# Altium PCB MotorBoardPannel.PcbDoc
Units mm, origin at the board's own origin, x right, y up, seen from the top; angles counter-clockwise.
Board outline 100 x 100 mm, 2 copper layers (Top, Bottom), stack 1.67 mm thick; 42 components, 22 nets, 151 pads, 44 vias.
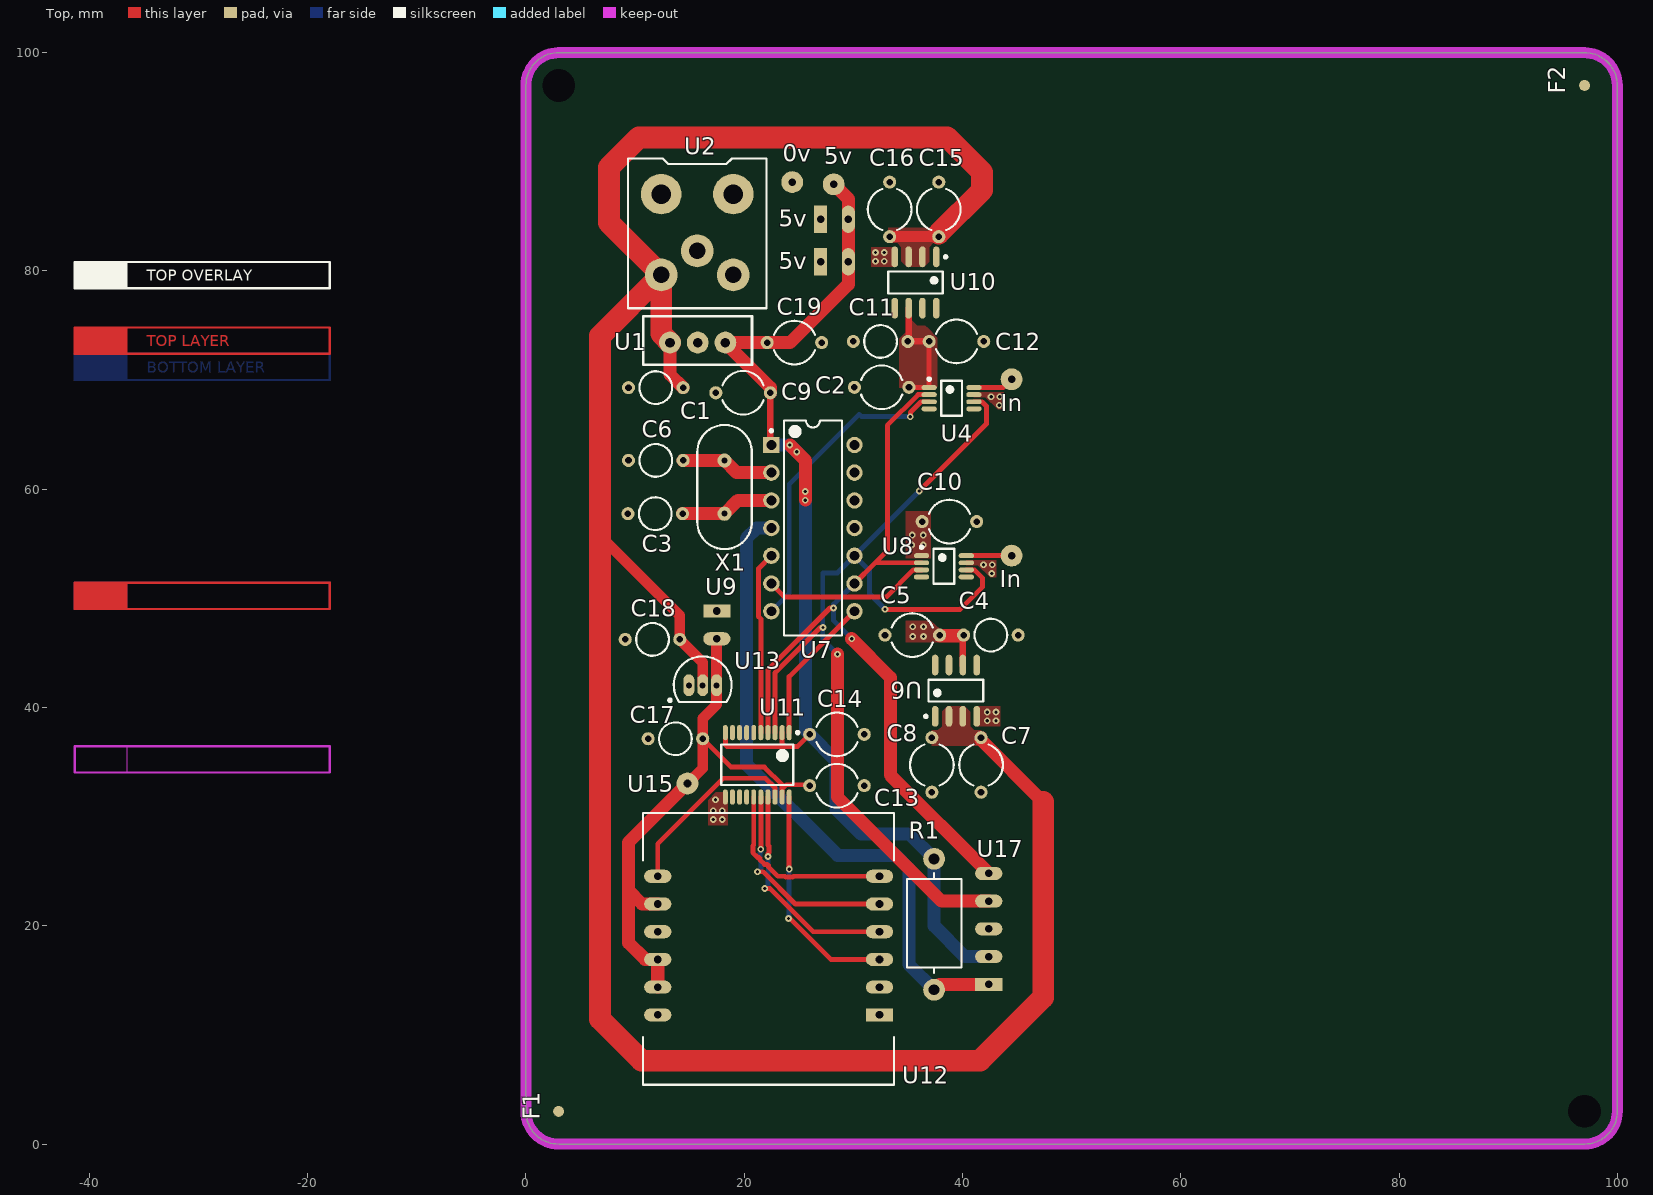
[diagram p0: Top view]
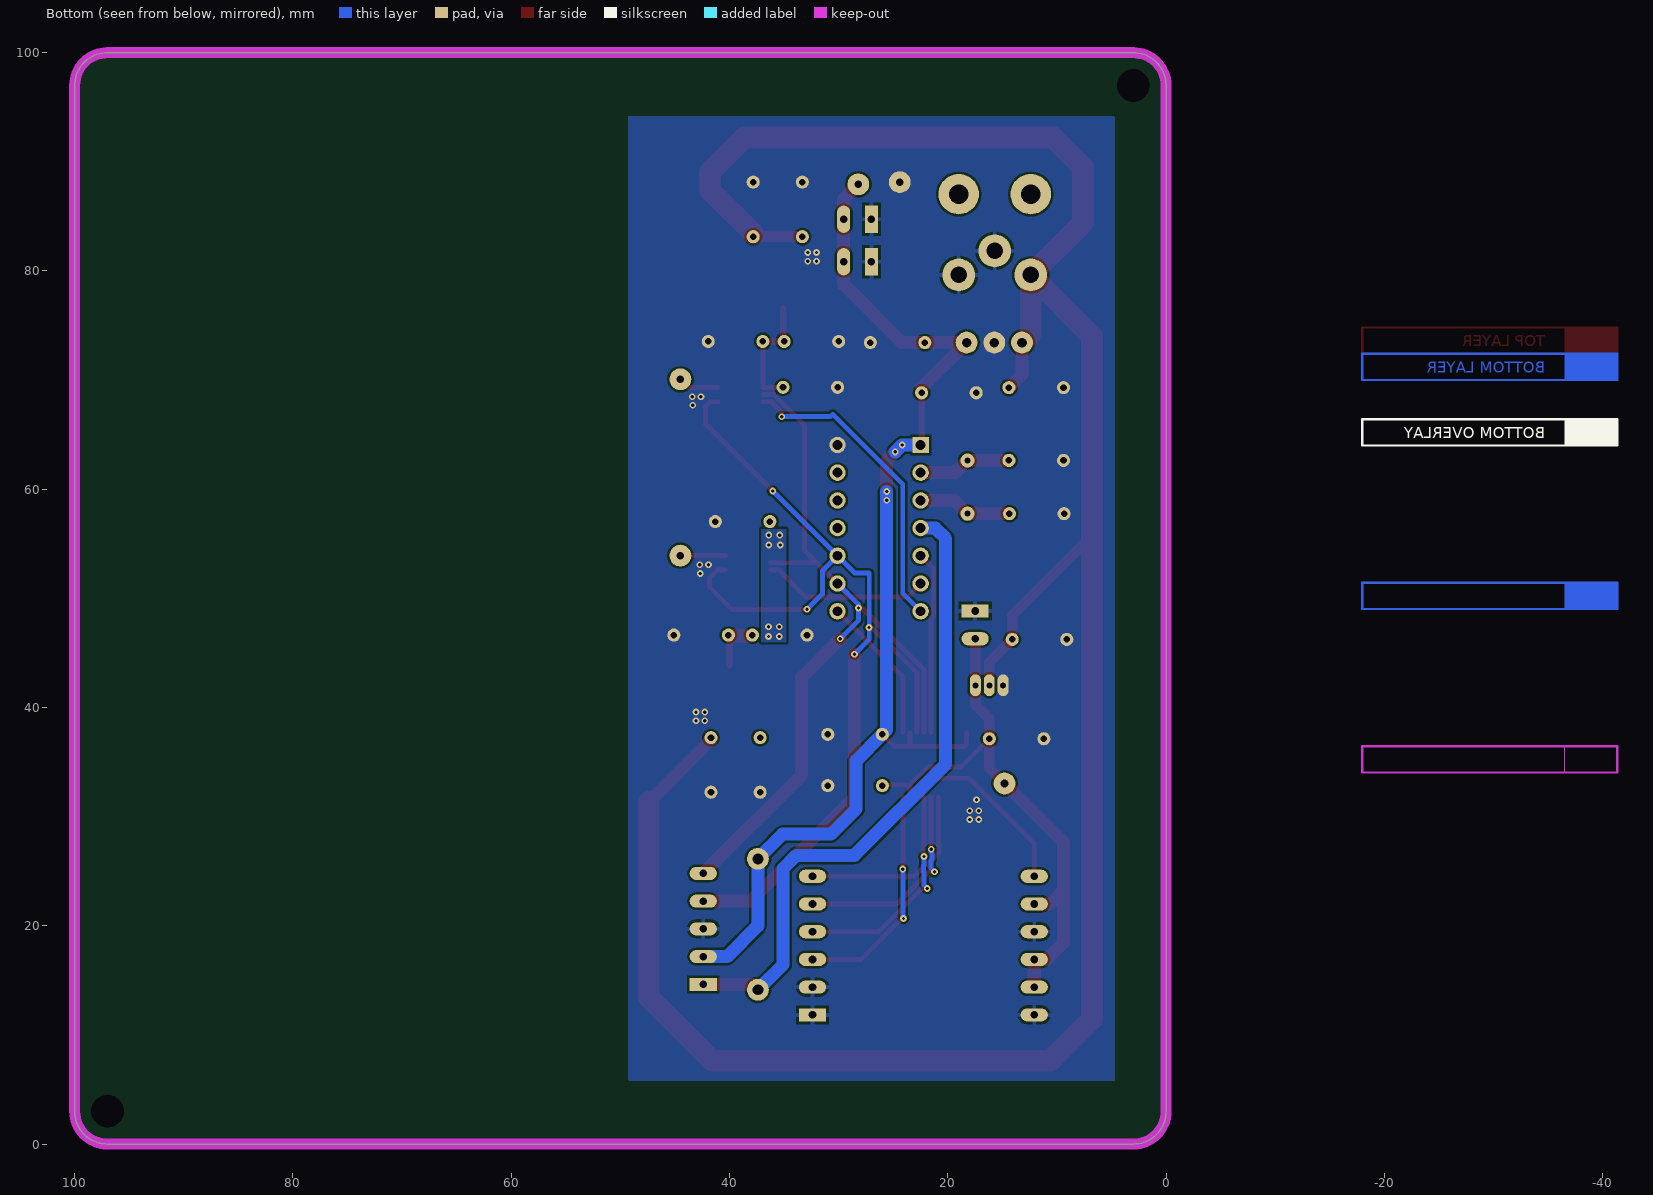
[diagram p1: Bottom view, seen from below]

## Layer stack, top to bottom
Top Solder: solder mask 0.0102, Solder Resist, Dk 3.5
Top: signal copper 0.035
Dielectric1: core 1.6, FR-4, Dk 4.58
Bottom: signal copper 0.035
Bottom Solder: solder mask 0.0102, Solder Resist, Dk 3.5

## Board outline
0,3 0,97 cw(c3,97) 3,100 97,100 cw(c97,97) 100,97 100,3 cw(c97,3) 97,0 3,0 cw(c3,3)

## Design rules (kind name [scope] priority, off if disabled: settings)
AssemblyTestPointUsage [All] p1 off:
AssemblyTestpoint [All] p1 off: testpointundercomponent=TRUE minsize=1.016 maxsize=2.54 preferedsize=1.524 minholesize=0 maxholesize=1.016 preferedholesize=0.813 testpointgrid=0.025 usegrid=TRUE gridtolerance=0 allowsidetop=TRUE allowsidebottom=TRUE
Clearance ClearanceViaPad [IsVia vs IsPad] p1: gap=0.1
Clearance ClearanceGNDpolygons [InPolygonClass('GNDpolygons')] p2: gap=0.3
Clearance ClearanceTechnology [All] p3: gap=0.2
FabricationTestPointUsage [All] p1 off: valid=0 allowmultiple=FALSE
FabricationTestpoint [All] p1 off: side=3 testpointundercomponent=TRUE minsize=1.016 maxsize=2.54 preferedsize=1.524 minholesize=0 maxholesize=1.016 preferedholesize=0.813 testpointgrid=0.025 allowsidetop=TRUE allowsidebottom=TRUE usegrid=TRUE gridtolerance=0
HoleSize [All] p1: absolutevalues=TRUE maxlimit=6.3 minlimit=0.3 maxpercent=80.000 minpercent=20.000
HoleToHoleClearance [All] p1: gap=0.3 allowstackedmicrovias=TRUE
MinimumAnnularRing [All] p1: minimumring=0.152
MinimumSolderMaskSliver [All] p1: minsoldermaskwidth=0.1
PlaneClearance [All] p1: clearance=0.25
PolygonConnect PolygonConnectVia [IsVia] p1: connectstyle=Direct reliefconductorwidth=0.4 reliefentries=4 polygonreliefangle="90 Angle" airgapwidth=0.254
PolygonConnect PolygonConnectBigPads [(ObjectKind = 'Pad') And ((AsMM(PadXSize_AllLayers) > 2) Or (AsMM(PadYSize_AllLayers) > 2))] p2: connectstyle=Relief reliefconductorwidth=0.4 reliefentries=4 polygonreliefangle="90 Angle" airgapwidth=0.254
PolygonConnect PolygonConnectGeneral [All] p3: connectstyle=Direct reliefconductorwidth=0.3 reliefentries=4 polygonreliefangle="90 Angle" airgapwidth=0.2
RoutingVias [All] p1: holewidth=0.6 width=1.2 viastyle="Through Hole" minholewidth=0.3 minwidth=0.62 maxholewidth=0.9 maxwidth=1.4
SilkToSilkClearance [All] p1: silktosilkclearance=0.15
SilkToSolderMaskClearance SilkscreenOverComponentPads [IsPad] p1: minsilkscreentomaskgap=0.1 clearancetoexposedcopper=FALSE
SolderMaskExpansion [All] p1: expansion=0.1
UnpouredPolygon [All] p1: allowunpoured=FALSE
Width WidthTechnology [All] p1: maxlimit=3 minlimit=0.16 preferedwidth=0.6
19 further rules are at their usual default settings.

## Components (designator, comment, footprint, x,y, rotation, side; value= is the part's Value field where it differs from the comment)
0v "Ground" Ground 24.4,88.14 r0 top (schematic designator U16)
5v "SignalOut" SignalOut 27,80.84 r90 top (schematic designator U3)
5v "SignalOut" SignalOut 27,84.74 r90 top (schematic designator U5)
5v "Ref" Ground 28.2,87.94 r0 top (schematic designator U14)
C1 "330nF" "FK18/24 Capacitor" 9.4,69.315 r0 top
C2 "680nF" "FK26/16 Capacitor" 30.1,69.34 r0 top
C3 "27pF" "FK18/24 Capacitor" 9.352,57.76 r0 top
C4 "1uF" "FK18/24 Capacitor" 45.1,46.64 r180 top
C5 "0.1uF" "FK26/16 Capacitor" 32.9,46.64 r0 top
C6 "27pF" "FK18/24 Capacitor" 9.4,62.64 r0 top
C7 "0.1uF" "FK26/16 Capacitor" 41.7,32.24 r90 top
C8 "10uF" "FK26/16 Capacitor" 37.2,32.24 r90 top
C9 "0.1uF" "FK26/16 Capacitor" 17.4,68.84 r0 top
C10 "680nF" "FK26/16 Capacitor" 41.3,57.04 r180 top
C11 "1uF" "FK18/24 Capacitor" 30,73.54 r0 top
C12 "0.1uF" "FK26/16 Capacitor" 41.95,73.54 r180 top
C13 "0.1uF" "FK26/16 Capacitor" 31,32.84 r180 top
C14 "0.1uF" "FK26/16 Capacitor" 26,37.54 r0 top
C15 "0.1uF" "FK26/16 Capacitor" 37.829,88.14 r270 top
C16 "10uF" "FK26/16 Capacitor" 33.329,88.14 r270 top
C17 "1uF" "FK18/24 Capacitor" 11.2,37.14 r0 top
C18 "1uF" "FK18/24 Capacitor" 9.1,46.24 r0 top
C19 "DNP" "FK26/16 Capacitor" 27.1,73.44 r180 top
F1 "Fiducial" FIDUCIAL 3,3 r90 top locked
F2 "Fiducial" FIDUCIAL 97,97 r90 top locked
In "Ref" Ground 44.5,70.075 r0 top (schematic designator U18)
In "Ref" Ground 44.5,53.915 r0 top (schematic designator U19)
R1 "DNP" "Axial 0.5" 37.405,14.14 r90 top
U1 "+5V LDO" MC7805CTG 13.2,73.44 r90 top
U2 "PJ-047A" PJ-047A 12.4,79.64 r90 top
U4 "AD7476ABRMZ" RM-8_L 39,68.34 r0 top
U6 "REF195GSZ" ADI-R-8_L 39.4,41.54 r90 top
U7 "PIC16F1455-I/P" MCHP-PDIP-P14 26.3,56.44 r0 top
U8 "AD7478AARMZ" RM-8_L 38.3,52.94 r0 top
U9 "SignalOut" SignalOut 17.5,48.84 r0 top
U10 "REF195GSZ" ADI-R-8_L 35.7,78.94 r270 top
U11 "TXB0108PWR" TSOP65P640X120-20N 21.2,34.751 r270 top
U12 "WIZ820io" WIZ5200 32.4,11.84 r180 top
U13 "MCP1700-3302E/TO" TO-92-TO3 16.2,42.04 r270 top
U15 "Ref" Ground 14.8,33.04 r0 top
U17 "ProgrammingHeader" ProgrammingHeader 42.405,14.64 r180 top
X1 "16MHz" 9B-16.000MEEJ-B 18.2,62.64 r270 top

## Footprints (in the part's own frame and the unit in brackets; to place one, negate y for a bottom-side part, rotate by r counter-clockwise, add the part's x,y. Pads: shape width x height; smd on the part's side, far side on the other; paste and mask are expansions set on the pad)
9B-16.000MEEJ-B [mm]
  round 1.3 hole 0.55: 1(0,0) 2(4.88,0)
  silkscreen extent -3.25,-2.5 8.13,2.5
ADI-R-8_L [mm] "SOIC, 8-Leads, Body 4.9x3.9mm, Pitch 1.27mm, IPC High Density"
  oval 1.9x0.6 smd: 1(-2.35,1.905) 2(-2.35,0.635) 3(-2.35,-0.635) 4(-2.35,-1.905) 5(2.35,-1.905) 6(2.35,-0.635) 7(2.35,0.635) 8(2.35,1.905)
  silkscreen extent -2.47,-2.5 1,2.88, body extent -2,-2.5 2,2.5, height 1.75
"Axial 0.5" [mm]
  round 2 hole 1: 1(0,0) 2(12,0)
  silkscreen extent 1.52,-2.5 10.67,2.5
FIDUCIAL [mm] "Fiducial"
  round 1 smd paste-1 mask+0.5: ""(0,0)
  body extent -0.49,-0.5 0.5,0.5, height 0.5
"FK18/24 Capacitor" [mm]
  round 1.2 hole 0.6: 1(0,0) 2(5,0)
  silkscreen extent 1,-1.5 4,1.5
"FK26/16 Capacitor" [mm]
  round 1.2 hole 0.6: 1(0,0) 2(5,0)
  silkscreen extent 0.62,-2 4.38,2
Ground [mm]
  round 2 hole 0.7: 1(0,0)
MC7805CTG [mm]
  round 2 hole 0.88: 1(0,0) 2(0,-2.54) 3(0,-5.08)
  silkscreen extent -2.03,-7.52 2.41,2.44
MCHP-PDIP-P14 [mm] "DIP, 14-Leads, Body 19.177x6.604mm, Pitch 2.54mm"
  rect 1.5x1.5 hole 0.9: 1(-3.81,7.62)
  round 1.5 hole 0.9: 2(-3.81,5.08) 3(-3.81,2.54) 4(-3.81,0) 5(-3.81,-2.54) 6(-3.81,-5.08) 7(-3.81,-7.62) 8(3.81,-7.62) 9(3.81,-5.08) 10(3.81,-2.54) 11(3.81,0) 12(3.81,2.54) 13(3.81,5.08) 14(3.81,7.62)
  silkscreen extent -3.93,-9.85 2.65,9.85, body extent -3.95,-9.85 3.95,9.85, height 5.34
PJ-047A [mm]
  round 3 hole 1.5: 1(0,0) 2(0,-6.6) 2(2.2,-3.3)
  round 3.7 hole 1.8: ""(7.4,-6.6) ""(7.4,0)
  silkscreen extent -3.05,-9.65 10.67,3.05
ProgrammingHeader [mm]
  rect 2.5x1.2 hole 0.7: 1(0,0)
  oval 2.5x1.2 hole 0.7: 2(0,-2.54) 3(0,-5.08) 4(0,-7.62) 5(0,-10.16)
RM-8_L [mm] "TSOP, 8-Leads, Body 3x3mm, Pitch 0.65mm, IPC High Density"
  oval 1.4x0.45 smd mask+0: 1(-2.05,0.975) 2(-2.05,0.325) 3(-2.05,-0.325) 4(-2.05,-0.975) 5(2.05,-0.975) 6(2.05,-0.325) 7(2.05,0.325) 8(2.05,0.975)
  silkscreen extent -2.17,-1.6 0.95,1.87, body extent -1.6,-1.6 1.6,1.6, height 1.1
SignalOut [mm]
  rect 2.5x1.2 hole 0.7: 1(0,0)
  oval 2.5x1.2 hole 0.7: 2(0,-2.54)
TO-92-TO3 [mm] "TO, Flat Index; 3 In-Line, Axial Leads; Body Dia. 4.8mm; Leads 0.56 x 0.53 mm (max)"
  oval 2x1 hole 0.55 mask+0.05: 1(0,-1.27) 2(0,0) 3(0,1.27)
  silkscreen extent -2.65,-3.13 1.52,2.65, body extent -2.66,-2.66 1.52,2.66, height 5.33
TSOP65P640X120-20N [mm] "TSOP, 20-Leads, Body 6.50x4.40mm, Pitch 0.65mm, IPC Medium Density"
  oval 1.4x0.45 smd mask+0.02: 1(-2.95,2.925) 2(-2.95,2.275) 3(-2.95,1.625) 4(-2.95,0.975) 5(-2.95,0.325) 6(-2.95,-0.325) 7(-2.95,-0.975) 8(-2.95,-1.625) 9(-2.95,-2.275) 10(-2.95,-2.925) 11(2.95,-2.925) 12(2.95,-2.275) 13(2.95,-1.625) 14(2.95,-0.975) 15(2.95,-0.325) 16(2.95,0.325) 17(2.95,0.975) 18(2.95,1.625) 19(2.95,2.275) 20(2.95,2.925)
  silkscreen extent -3.07,-3.3 1.85,3.83, body extent -2.25,-3.3 2.25,3.3, height 1.2
WIZ5200 [mm]
  rect 2.5x1.2 hole 0.7: 1(0,0)
  oval 2.5x1.2 hole 0.7: 2(0,-2.54) 3(0,-5.08) 4(0,-7.62) 5(0,-10.16) 6(0,-12.7) 7(20.32,-12.7) 8(20.32,-10.16) 9(20.32,-7.62) 10(20.32,-5.08) 11(20.32,-2.54) 12(20.32,0)
  silkscreen extent -1.34,-18.5 21.66,6.4

## Part data
C1: library part FK24X7R1H334K, "CAP CER 0.33UF 50V 10% RADIAL"
C2 C10: library part FK26X7R1H684K, "CAP CER 0.68UF 50V 10% RADIAL"
C3 C6: library part FK18C0G1H270J, "CAP CER 27PF 50V 5% RADIAL"
C4 C11 C17 C18: library part FK24X7R1H105K, "CAP CER 1UF 50V 10% RADIAL"
C5 C7 C9 C12 C13 C14 C15: library part FK26X7R2A104K, "CAP CER 0.1UF 100V 10% RADIAL"
C8 C16: library part FK16X7R1C106K, "CAP CER 10UF 16V 10% RADIAL"
C19: library part "DNP Cap"
R1: library part "DNP Res"
U1: library part MC7805CTG, "IC REG LDO 5V 1A TO220AB"
U2: "CON PWR JCK 2.0 X 6.0MM W/SHLD"
U4: "Single 12-Bit Analog-to-Digital Converter with Serial, SPI Interface, 2.35 to 5.25 V, 1MSPS, -40 to +85 degC, RM-8, Pb-Free, Tube"
U6 U10: "Precision Micropower, Low Dropout Voltage Reference, 5 V Output, 5.1 to 15 V Supply, Industrial, 8-pin SOIC (R-8), Tube"
U7: "8-Bit Flash USB Microcontroller with XLP Technology, 48 MHz, 11 I/O, -40 to 85 degC, 14-pin PDIP (P14), Tube"
U8: "Single 8-Bit Analog-to-Digital Converter with Serial, SPI Interface,2.35 V, 1.2MSPS, -40 to +85 degC, RM-8, Pb-Free, Tube"
U11: "IC 8-BIT TRNSTR 15KV ESD 20TSSOP"
U12: "Ethernet Modules W5200 & MAG JACK ioPLATFORM MODULE"
U13: "Low Quiescent Current LDO, 3-Pin TO-92, Extended TemperatureBAG"
X1: library part 9B-16.000MEEJ-B, "CRYSTAL 16MHZ 18PF THRU"

## Free pads (board coordinates)
  round 1 hole 3: 0(3,97) 0(97,3)

## Via types
v1: diameter 0.62, hole 0.3, Top to Bottom, 40 vias
v2: diameter 0.62, hole 0.3, Top to Bottom, tented bottom, 4 vias

## Nets (pads, with @x,y where several pads share a name; then routed paths per layer and width w, separated by ;. In a path a pad name is that pad's centre, name@x,y a point inside that pad or via, vN(x,y) a via of type N, cw(c..) or ccw(c..) an arc to the next point about the centre after c; other vN are vias at no path point)
GND: 0v.1 5v.1@27,80.84 5v.1@27,84.74 C1.1 C2.1 C3.1 C4.1 C5.1 C6.1 C7.1 C8.1 C9.1 C10.1 C11.1 C12.1 C13.1 C14.2 C15.1 C16.1 C17.1 C18.1 C19.1 U1.2 U2.2 U4.7 U6.4 U7.14 U8.7 U9.1 U10.4 U11.11 U12.1 U12.2 U12.9 U12.12 U13.1 U17.3 | length 0.1
  Top w0.6: U1.2@15.7,73.48 U1.2
  other v1: 17.175,29.75 18,29.75 17.175,30.55 18,30.55 17.375,31.55 42.275,38.78 43.075,38.78 42.275,39.58 43.075,39.58 41.925,53.075 42.625,68.475 32.025,80.9 32.825,80.9 32.025,81.7 32.825,81.7
  other v2: 42.675,52.286 42.725,53.075 43.375,67.686 43.425,68.475
MCLR: R1.1 U7.4 U17.1 | length 59.5
  Top w1.2: R1.1 37.905,14.64 U17.1
  Bottom w1.2: U7.4 21.14,56.44 20.2,55.5 20.2,34.809 28.555,26.453 33.877,26.453 35.1,25.23 35.1,16.445 R1.1
NetC3_2: C3.2 U7.3 X1.2 | length 8.6
  Top w1.2: C3.2 X1.2 19.42,58.98 U7.3
NetC6_2: C6.2 U7.2 X1.1 | length 8.6
  Top w1.2: C6.2 X1.1 19.32,61.52 U7.2
NetU4_3: U4.3 U7.7 | length 28.7
  Top w0.45: v1(35.225,66.65) 35.225,67.034 36.206,68.015 U4.3
  Bottom w0.45: U7.7 24.13,50.46 24.13,60.47 30.534,66.874 30.758,66.65 v1(35.225,66.65)
NetU4_8: In.1@44.5,70.075 U4.8 | length 3.8
  Top w0.45: U4.8 43.74,69.315 In.1@44.5,70.075
NetU7_5: U7.5 U11.5 | length 16.8
  Top w0.45: U11.5 21.525,48.123 21.315,48.333 21.315,52.725 U7.5
NetU7_6: U7.6 U8.3 | length 15.3
  Top w0.45: U7.6 23.732,50.118 33.008,50.118 35.506,52.615 U8.3
NetU7_8: U7.8 U11.1 | length 13.6
  Top w0.45: U11.1 24.125,42.835 U7.8
NetU8_8: In.1@44.5,53.915 U8.8 | length 4.1
  Top w0.45: U8.8 In.1@44.5,53.915
NetU11_15: U11.15 U12.6 | length 17.8
  Top w0.45: U11.15 20.875,27.399 20.79,27.314 20.79,26.705 21.221,26.274 21.341,26.274 21.44,26.175 21.44,26.055 21.871,25.624 22.111,25.624 22.213,25.522 22.213,25.402 23.075,24.54 23.739,24.54 23.821,24.459 24.429,24.459 24.511,24.54 U12.6
NetU11_16: U11.16 U12.5 | length 19
  Top w0.45: v1(21.226,24.951) 21.745,24.951 24.696,22 U12.5 ; v1(21.525,27.009) U11.16
  Bottom w0.45: 21.525,25.265 21.525,25.97 21.44,26.055 21.44,26.664 21.525,26.749 v1(21.525,27.009)
NetU11_17: U11.17 U12.4 | length 20.3
  Top w0.45: v1(21.876,23.426) 22.35,23.426 26.317,19.46 U12.4 ; v1(22.175,26.359) 22.175,26.62 22.26,26.705 22.26,27.314 22.175,27.399 U11.17
  Bottom w0.45: 22.175,23.74 22.175,24.876 22.213,24.913 22.213,25.522 22.175,25.56 v1(22.175,26.359)
NetU11_18: U11.18 U12.7 | length 17.4
  Top w0.45: U12.7 12.08,27.52 18.084,33.524 21.944,33.524 22.825,32.643 U11.18
NetU11_20: U11.20 U12.3 | length 21
  Top w0.45: v1(24.051,20.676) 24.181,20.676 27.937,16.92 U12.3 ; v1(24.125,25.194) U11.20
  Bottom w0.45: v1@24.125,20.74 v1(24.125,25.194)
PGC: U4.2 U7.9 U8.2 U11.4 U17.5 | length 72.3
  Top w0.45: U11.4 22.175,43.443 27.857,49.125 v1(28.175,49.125) ; U7.9 32.015,53.265 ; U8.2 32.015,53.265 ; U4.2 35.937,68.665 33.122,65.85 33.122,54.372 32.015,53.265
  Top w1.2: v1(29.85,46.3) 33.4,42.75 33.4,33.805 U17.5
  Bottom w0.45: v1(29.85,46.3) 28.2,47.95 28.2,49.468 28.218,49.468 U7.9
PGD: U4.6 U7.10 U8.6 U11.3 U17.4 | length 92.6
  Top w0.45: U11.3 22.825,43.173 26.991,47.339 v1(27.225,47.339) ; v1(32.9,49) 39.8,49 41.85,51.05 41.85,51.859 41.094,52.615 U8.6 ; v1(36.05,59.84) 42.2,65.99 42.2,67.609 41.794,68.015 U4.6@41.05,68.015
  Top w1.2: v1(28.55,44.89) 28.55,31.79 38.08,22.26 U17.4
  Bottom w0.45: v1(28.55,44.89) 27.196,46.244 27.196,47.544 27.196,52.336 28.546,52.336 U7.10 ; v1(32.9,49) 31.5,50.4 31.5,52.51 U7.10 ; v1(36.05,59.84) U7.10
V3V3: C13.2 C17.2 U9.2 U11.19 U12.8 U12.10 U12.11 U13.3 U15.1 | length 53.9
  Top w0.45: C17.2 18.8,34.54 21.847,34.54 23.475,32.912 U11.19 23.475,32.545 23.856,32.926 26,32.926 C13.2
  Top w1: U15.1 16.2,34.44 C17.2 16.2,38.99 17.47,40.26 U13.3 U9.2@17.47,46.27
  Top w1.2: U12.11 U12.10 10.92,16.92 9.4,18.44 9.4,23.24 ; U12.8 10.64,22 9.4,23.24 ; U15.1 9.4,27.64 9.4,23.24
VCC: 5v.1@28.2,87.94 5v.2 C9.2 C14.1 C19.2 R1.2 U1.3 U7.1 U11.2 U11.10 U17.2 | length 106.6
  Top w0.45: U11.10 18.275,36.59 18.425,36.44 23.7,36.44 ; U11.2 23.475,36.665 23.7,36.44 ; C14.1 24.9,36.44 23.7,36.44
  Top w0.6: U7.1@22.4,64.15 C9.2
  Top w1.2: C9.2 22.4,69.32 U1.3 C19.2 24.2,73.44 29.54,78.78 29.54,80.84 29.54,86.6 5v.1@28.2,87.94 ; v1(24.183,64.06) 25.6,62.643 v1(25.6,59)
  Bottom w1.2: U7.1 v1(24.183,64.06) v1(24.818,63.425) ; v1(25.6,59.8) 25.6,37.94 C14.1 28.4,35.14 28.4,30.7 30.7,28.4 35.145,28.4 R1.2 37.405,20 40.225,17.18 U17.2
VIN: C1.2 C7.2 C8.2 C15.2 C16.2 C18.2 U1.1 U2.1 U6.2 U6.3 U10.2 U10.3 U13.2 | length 230.5
  Top w1: 6.8,55.74 14.1,48.44 C18.2 16.2,44.14 U13.2 ; C16.2 C15.2 C15.2@37.829,83.44
  Top w1.2: U1.1 13.2,70.515 C1.2 ; C7.2 41.7,37.04 47.4,31.34
  Top w2: U1.1 12.4,74.24 U2.1 ; C15.2@37.829,83.44 41.8,87.411 41.8,89.04 38.6,92.24 10.363,92.24 7.6,89.477 7.6,84.44 U2.1 ; 47.4,31.34 47.4,13.44 41.6,7.64 10.6,7.64 6.8,11.44 6.8,55.74 6.8,74.04 U2.1
VREF8: C4.2 C5.2 C10.2 U6.6 U8.1 | length 4.8
  Top w0.6: U6.6 C4.2@40.035,46.575
  Top w1.2: C5.2@37.965,46.575 C4.2@40.035,46.575
  other v1: 35.45,46.5 36.421,46.5 35.45,47.4 36.421,47.4 35.361,54.9 36.4,54.9 35.393,55.798 36.4,55.798
VREF12: C2.2 C11.2 C12.2 U4.1 U10.6 | length 11
  Top w0.45: C2.2 35.125,69.315 U4.1 C12.2
  Top w0.6: U10.6 35.065,73.605 35.13,73.54 C12.2
pads on no net: F1. F2. U2. U4.4 U4.5 U6.1 U6.5 U6.7 U6.8 U7.11 U7.12 U7.13 U8.4 U8.5 U10.1 U10.5 U10.7 U10.8 U11.6 U11.7 U11.8 U11.9 U11.12 U11.13 U11.14
copper on no net: | length 103.1
  Top w0.2: -41.342,72.414 -41.342,74.827 -17.974,74.827 -17.974,72.414 -41.342,72.414
  Bottom w0.2: -41.342,70.001 -41.342,72.414 -17.974,72.414 -17.974,70.001 -41.342,70.001

## Polygon pours and split planes (outlines as drawn)
GND on Top "GND Plane Top" (solid, pour order 21): 18.5,32.24 18.5,29.225 16.7,29.225 16.7,31.5 16.7,31.54 17.4,32.24
GND on Top "GNP Plane Top" (solid, pour order 14): 31.65,80.38 31.65,82.18 33.783,82.18 33.783,80.38
VREF12 on Top "VRef12 Plane Top" (solid, pour order 20): 34.8,75.54 34.8,74.4 34.2,73.8 34.2,69.315 37.605,69.315 37.7,69.41 37.7,73.54 37.7,73.9 36.8,74.8 36.6,75 35.9,75 35.861,75 35.361,75.5 35.361,75.54
VIN on Top "Vin Plane Top" (solid, pour order 15): 36.335,80.38 35.065,80.38 34.9,80.38 34.4,80.88 34.4,82.18 34.1,82.48 34,82.58 33.2,82.58 33.2,83.98 37.9,83.98 37.9,82.58 37.4,82.58 37.345,82.58 36.945,82.18 36.945,80.88 36.945,80.825 36.5,80.38
VREF8 on Top "VRef8 Plane Top" (solid, pour order 19): 37.075,47.95 34.805,47.95 34.805,46 37.872,46 37.9,46.028 37.9,47.227
VREF8 on Top "GNP Plane Top" (solid, pour order 17): 37.075,53.7 37.075,57.978 35.622,57.978 34.805,57.977 34.796,53.7
VIN on Top "GNP Plane Top" (solid, pour order 16): 38.765,40.1 40.035,40.1 40.2,40.1 40.7,39.6 40.7,38.3 41,38 41.1,37.9 41.7,37.9 41.7,36.5 37.2,36.5 37.2,37.9 37.7,37.9 37.755,37.9 38.155,38.3 38.155,39.6 38.155,39.655 38.6,40.1 38.765,40.1
GND on Top "GND Top Bottom" (solid, pour order 24): 40.35,53.475 43.075,53.475 43.075,51.95 43.05,51.925 42.725,51.925 42.525,51.925 41.4,53.05 40.35,53.05
GND on Top "GND Top Bottom" (solid, pour order 23): 41.05,68.875 43.775,68.875 43.775,67.35 43.75,67.325 43.425,67.325 43.225,67.325 42.1,68.45 41.05,68.45
GND on Top "GNP Plane Top" (solid, pour order 13): 43.45,40.1 43.45,38.3 41.317,38.3 41.317,40.1
GND on Bottom "GND Plane Bottom" (solid, pour order 22): 4.7,5.79 4.7,94.19 49.3,94.19 49.3,5.79
VREF8 on Bottom "VRef8 Plane Bottom" (solid, pour order 18): 34.805,56.356 37.075,56.356 37.075,46 34.805,46

## Keep-outs
Keep-Out Layer:
  rectangle: -41.342,34.035 -36.516,36.448
  lines w0.2: -41.342,34.035 -41.342,36.448 -17.974,36.448 -17.974,34.035 -41.342,34.035
  lines w1: 3,100 ccw(c3,97) 0,97 0,3 ccw(c3,3) 3,0 97,0 ccw(c97,3) 100,3 ; 3,100 3,100 ; 3,100 97,100 ; 97,100 cw(c97,97) 100,97 ; 97,100 97,100 ; 100,3 100,97 ; 100,3 100,3 ; 100,97 100,97
  text "ROUTING KEEPOUT LAYER" at -34.738,34.721 h0.89

## Other copper
Top:
  rectangle: -41.342,72.414 -36.516,74.827
  text "TOP LAYER" at -34.738,73.1 h1.02
Bottom:
  rectangle: -41.342,70.001 -36.516,72.414
  text "BOTTOM LAYER" at -34.738,70.687 h1.02
Multi-Layer:
  rectangle: -41.342,49.021 -36.516,51.434
  lines w0.2: -41.342,49.021 -41.342,51.434 -17.974,51.434 -17.974,49.021 -41.342,49.021
  text "MULTILAYER" at -34.738,49.707 h1.02

## Silkscreen, mask and mechanical layers (free items; w line width, h text height)
Top Overlay:
  rectangle: -41.342,78.409 -36.516,80.822
  lines w0.2: -41.342,78.409 -17.974,78.409 -17.974,80.822 -41.342,80.822 -41.342,78.409
  text "TOP OVERLAY" at -34.738,79.094 h1.02
Bottom Overlay:
  rectangle: -41.342,64.007 -36.516,66.42
  lines w0.2: -41.342,64.007 -17.974,64.007 -17.974,66.42 -41.342,66.42 -41.342,64.007
  text "BOTTOM OVERLAY" at -34.738,64.693 h1.02
Top Paste:
  rectangle: -41.342,81.406 -36.516,83.819
  lines w0.2: -41.342,81.406 -41.342,83.819 -17.974,83.819 -17.974,81.406 -41.342,81.406
  text "TOP PASTE" at -34.738,82.092 h1.02
Bottom Paste:
  rectangle: -41.342,61.01 -36.516,63.423
  lines w0.2: -41.342,61.01 -41.342,63.423 -17.974,63.423 -17.974,61.01 -41.342,61.01
  text "BOTTOM PASTE" at -34.738,61.695 h1.02
Top Solder:
  rectangle: -41.342,75.411 -36.516,77.824
  lines w0.2: -41.342,75.411 -17.974,75.411 -17.974,77.824 -41.342,77.824 -41.342,75.411
  text "TOP SOLDER MASK" at -34.738,76.097 h1.02
Bottom Solder:
  rectangle: -41.342,67.004 -36.516,69.417
  lines w0.2: -41.342,67.004 -41.342,69.417 -17.974,69.417 -17.974,67.004 -41.342,67.004
  text "BOTTOM SOLDER MASK" at -34.738,67.69 h1.02
Drill Guide:
  rectangle: -41.342,58.012 -36.516,60.425
  lines w0.2: -41.342,58.012 -17.974,58.012 -17.974,60.425 -41.342,60.425 -41.342,58.012
  text "DRILL GUIDE (SLOTS)" at -34.738,58.698 h1.02
Outline:
  rectangle: -41.342,52.018 -36.516,54.431
  lines w0.1: 0,3 ccw(c3,3) 3,0 97,0 ccw(c97,3) 100,3 100,97 ccw(c97,97) 97,100 3,100 ccw(c3,97) 0,97 0,3
  lines w0.2: -41.342,52.018 -17.974,52.018 -17.974,54.431 -41.342,54.431 -41.342,52.018
  lines w0.25: 119.824,-28.075 248.576,-28.075 ; 119.824,-23.725 248.576,-23.725 ; 118.3,-48 ccw(c119.7,-48) 119.7,-49.4 248.7,-49.4 ccw(c248.7,-48) 250.1,-48 250.1,-19 ccw(c248.7,-19) 248.7,-17.6 119.7,-17.6 ccw(c119.7,-19) 118.3,-19 118.3,-48
  lines w0.254: -43.882,117.702 69,117.702 69,112 ; -43.882,122.827 69,122.827 69,117.136 ; -39.056,86.105 -19.498,86.105 ; 33,112 33,117.702 ; 69,122.825 94.975,122.825 ; -43.882,31.825 -43.882,91.693 -15.18,91.693 -15.18,31.825 -43.882,31.825 ; -43.882,112 95,112 95,130.05 -43.882,130.05 -43.882,112
  text ".GlobalProjectName" at -32.125,124.975 h3
  text "Project:" at -42.406,124.816 h1.2
  text ".GlobalProjectTeam" at -34.65,119.3 h2.03
  text ".GlobalProjectLink" at 35.15,119.3 h2.03
  text "Team:" at -42.406,119.225 h1.2
  text "More info:" at 25.35,119.225 h1.2
  text ".GlobalProjectRevision" at 75,114 h7
  text ".Pcb_File_Name_No_Path" at -28,113.934 h2.03
  text "PCB file name:" at -42.406,113.907 h1.2
  text ".GlobalRevisionDate" at 48.119,113.507 h2.03
  text "Rev:" at 71,113.507 h1.2
  text "Revision date:" at 34.944,113.407 h1.2
  text "LAYER USAGE" at -39.056,86.816 h2.03
  text "Fusion service size limits" at 131,76.8 h5
  text "5cm X 5cm" at 134,71.802 h5
  text "5cm X 10cm" at 134,68.024 h5
  text "5cm X 15cm" at 134,64.246 h5
  text "5cm X 20cm" at 134,60.468 h5
  text "10cm X 10cm" at 134,56.69 h5
  text "10cm X 15cm" at 134,52.912 h5
  text "BOARD OUTLINE" at -34.738,52.704 h1.02
  text "10cm X 20cm" at 134,49.134 h5
  text "15cm X 15cm" at 134,45.356 h5
  text "15cm X 20cm" at 134,41.578 h5
  text "20cm X 20cm" at 134,37.8 h5
  text "Layer Stack Up Detail for: 2 Layer Seed Fusion template" at 119.824,-22.178 h2.05
  text "Layer" at 119.824,-25.35 h1
  text "Gerber" at 147.375,-25.35 h1
  text "Copper" at 161.317,-25.35 h1
  text "Dielectric" at 176.892,-25.35 h1
  text "Dielectric" at 193.166,-25.35 h1
  text "Dielectric" at 213.72,-25.35 h1
  text "Dielectric" at 229.994,-25.35 h1
  text "Name" at 119.824,-27.35 h1
  text "Document" at 147.375,-27.35 h1
  text "Thickness" at 161.317,-27.35 h1
  text "Height" at 176.892,-27.35 h1
  text "Material" at 193.166,-27.35 h1
  text "Constant" at 213.72,-27.35 h1
  text "Type" at 229.994,-27.35 h1
  text "Top Solder Mask" at 119.824,-31.222 h1.4
  text "(.GTS)" at 147.375,-31.222 h1.4
  text "0.0102mm" at 176.892,-31.222 h1.4
  text "Solder Resist" at 193.166,-31.222 h1.4
  text "3.50" at 213.72,-31.222 h1.4
  text "Top" at 119.824,-35.252 h1.4
  text "(.GTL)" at 147.375,-35.252 h1.4
  text "0.035mm" at 161.317,-35.252 h1.4
  text "1.6mm" at 176.892,-37.267 h1.4
  text "FR-4" at 193.166,-37.267 h1.4
  text "4.58" at 213.72,-37.267 h1.4
  text "Core" at 229.994,-37.267 h1.4
  text "Bottom" at 119.824,-39.282 h1.4
  text "(.GBL)" at 147.375,-39.282 h1.4
  text "0.035mm" at 161.317,-39.282 h1.4
  text "Bottom Solder Mask" at 119.824,-43.312 h1.4
  text "(.GBS)" at 147.375,-43.312 h1.4
  text "0.0102mm" at 176.892,-43.312 h1.4
  text "Solder Resist" at 193.166,-43.312 h1.4
  text "3.50" at 213.72,-43.312 h1.4
Dimensions:
  rectangle: -41.342,37.032 -36.516,39.445
  lines w0.2: -41.146,-10.834 -23.061,-10.834 ; -41.07,-2.782 -22.985,-2.782 ; -41.07,16.369 -22.985,16.369 ; -41.045,8.673 -22.96,8.673 ; -40.918,19.798 -22.833,19.798 ; -41.342,37.032 -17.974,37.032 -17.974,39.445 -41.342,39.445 -41.342,37.032
  lines w0.254: -42.064,-17.8 -42.064,23.583 -17.908,23.583 -17.908,-17.8 -42.064,-17.8
  text "DIMENSIONS" at -34.738,37.718 h1.02
  text "BUILD STATISTICS" at -40.816,20.586 h1.52
  text "GENERAL" at -41.019,16.877 h1.02
  text ".Net_Count" at -31.342,14.769 h1.02
  text "NETS" at -40.943,14.718 h0.89
  text ".Component_Count" at -31.342,12.686 h1.02
  text "COMPONENTS" at -40.918,12.661 h0.89
  text "PRIMITIVES" at -40.994,9.181 h1.02
  text ".Fill_Count" at -31.342,7.048 h1.02
  text "FILLS" at -40.918,7.022 h0.89
  text ".Track_Count" at -31.342,4.99 h1.02
  text "TRACKS" at -40.918,4.939 h0.89
  text ".String_Count" at -31.342,2.907 h1.02
  text "STRINGS" at -40.918,2.857 h0.89
  text ".Arc_Count" at -31.342,0.799 h1.02
  text "ARC'S" at -40.918,0.748 h0.89
  text "LANDS" at -41.019,-2.274 h1.02
  text ".Pad_Count" at -31.342,-4.408 h1.02
  text ".Pad_Count" at -31.342,-4.408 h1.02
  text "PADS" at -40.918,-4.459 h0.89
  text ".Via_Count" at -31.342,-6.491 h1.02
  text "VIA'S" at -40.892,-6.516 h0.89
  text "PRINT SCALE" at -41.095,-10.326 h1.02
  text ".Print_Scale" at -31.393,-12.485 h1.02
  text "SCALE" at -40.968,-12.51 h0.89
  text ".Print_Date" at -31.393,-14.542 h1.02
  text "PRINT DATE" at -40.943,-14.568 h0.89
  text ".Print_Time" at -31.367,-16.6 h1.02
  text "PRINT TIME" at -40.918,-16.625 h0.89
Assembly Top:
  rectangle: -41.342,46.024 -36.516,48.437
  lines w0.2: -41.342,46.024 -41.342,48.437 -17.974,48.437 -17.974,46.024 -41.342,46.024
  text "TOP ASSEMBLY" at -34.738,46.709 h1.02
Assembly Bot:
  rectangle: -41.342,43.026 -36.516,45.439
  lines w0.2: -41.342,43.026 -41.342,45.439 -17.974,45.439 -17.974,43.026 -41.342,43.026
  text "BOTTOM ASSEMBLY" at -34.738,43.712 h1.02
Drill Drawing:
  circle w0.025: c0.316,-31.801 r0.635
  circle w0.025: c0.316,-35.611 r0.381
  circle w0.025: c0.316,-35.611 r0.635
  rectangle: -41.342,55.015 -36.516,57.428
  lines w0.025: -0.319,-43.866 0.951,-43.866 0.951,-42.596 -0.319,-42.596 -0.319,-43.866 ; -0.319,-40.056 0.951,-40.056 0.951,-38.786 -0.319,-38.786 -0.319,-40.056 ; -0.319,-27.991 0.316,-28.626 0.951,-27.991 0.316,-27.356 -0.319,-27.991 ; -0.319,-24.498 -0.002,-24.498 0.316,-24.816 0.633,-24.498 0.951,-24.498 0.633,-24.181 0.951,-23.863 0.633,-23.863 0.316,-23.546 -0.002,-23.863 -0.319,-23.863 -0.002,-24.181 -0.319,-24.498 ; -0.319,-19.736 0.951,-19.736 0.316,-21.006 -0.319,-19.736 ; -0.319,-17.196 0.316,-16.878 0.951,-17.196 0.633,-16.561 0.951,-15.926 0.316,-16.243 -0.319,-15.926 -0.002,-16.561 -0.319,-17.196 ; -0.319,-13.068 -0.002,-13.068 0.316,-13.386 0.633,-13.068 0.951,-13.068 0.633,-12.751 0.951,-12.433 0.633,-12.433 0.316,-12.116 -0.002,-12.433 -0.319,-12.433 -0.002,-12.751 -0.319,-13.068 ; -0.319,-8.306 0.951,-8.306 0.316,-9.576 -0.319,-8.306 ; -0.065,-39.802 0.697,-39.802 0.697,-39.04 -0.065,-39.04 -0.065,-39.802 ; -0.065,-19.99 0.697,-19.99 0.316,-20.752 -0.065,-19.99 ; -0.065,-12.941 0.125,-12.941 0.316,-13.132 0.506,-12.941 0.697,-12.941 0.506,-12.751 0.697,-12.56 0.506,-12.56 0.316,-12.37 0.125,-12.56 -0.065,-12.56 0.125,-12.751 -0.065,-12.941
  lines w0.2: -41.342,55.015 -41.342,57.428 -17.974,57.428 -17.974,55.015 -41.342,55.015
  lines w0.381: -2.05,-45.009 96.476,-45.009 ; -2.05,-6.909 96.476,-6.909 ; 11.943,-48.819 11.943,-3.099 ; 29.667,-48.819 29.667,-3.099 ; 63.846,-48.819 63.846,-3.099 ; 76.695,-48.819 76.695,-3.099 ; -2.05,-48.819 96.476,-48.819 96.476,-3.099 -2.05,-3.099 -2.05,-48.819
  text "DRILL DRAWING" at -34.738,55.701 h1.02
  text "Symbol" at 0.236,-5.766 h1.83
  text "Hit Count" at 13.086,-5.766 h1.83
  text "Finished Hole Size" at 30.81,-5.766 h1.83
  text "Plated" at 64.989,-5.766 h1.83
  text "Hole Type" at 77.838,-5.766 h1.83
  text "2" at 13.086,-9.576 h1.52
  text "1.0mm" at 30.81,-9.576 h1.52
  text "PTH" at 64.989,-9.576 h1.52
  text "Round" at 77.838,-9.576 h1.52
  text "2" at 13.086,-13.386 h1.52
  text "1.8mm" at 30.81,-13.386 h1.52
  text "PTH" at 64.989,-13.386 h1.52
  text "Round" at 77.838,-13.386 h1.52
  text "2" at 13.086,-17.196 h1.52
  text "3.0mm" at 30.81,-17.196 h1.52
  text "PTH" at 64.989,-17.196 h1.52
  text "Round" at 77.838,-17.196 h1.52
  text "3" at 13.086,-21.006 h1.52
  text "0.9mm" at 30.81,-21.006 h1.52
  text "PTH" at 64.989,-21.006 h1.52
  text "Round" at 77.838,-21.006 h1.52
  text "3" at 13.086,-24.816 h1.52
  text "1.5mm" at 30.81,-24.816 h1.52
  text "PTH" at 64.989,-24.816 h1.52
  text "Round" at 77.838,-24.816 h1.52
  text "5" at 13.086,-28.626 h1.52
  text "0.6mm" at 30.81,-28.626 h1.52
  text "PTH" at 64.989,-28.626 h1.52
  text "Round" at 77.838,-28.626 h1.52
  text "14" at 13.086,-32.436 h1.52
  text "0.9mm" at 30.81,-32.436 h1.52
  text "PTH" at 64.989,-32.436 h1.52
  text "Round" at 77.838,-32.436 h1.52
  text "28" at 13.086,-36.246 h1.52
  text "0.7mm" at 30.81,-36.246 h1.52
  text "PTH" at 64.989,-36.246 h1.52
  text "Round" at 77.838,-36.246 h1.52
  text "38" at 13.086,-40.056 h1.52
  text "0.6mm" at 30.81,-40.056 h1.52
  text "PTH" at 64.989,-40.056 h1.52
  text "Round" at 77.838,-40.056 h1.52
  text "44" at 13.086,-43.866 h1.52
  text "0.3mm" at 30.81,-43.866 h1.52
  text "PTH" at 64.989,-43.866 h1.52
  text "Round" at 77.838,-43.866 h1.52
  text "141 Total" at 13.086,-47.676 h1.52

## Dimensions
97,0 to 97,100 on Dimensions
0,3 to 100,3 on Dimensions